# Altium PCB SAST_PCB_V2B_Test_Beta_Sensors.PcbDoc
Units mil, origin at the board's own origin, x right, y up, seen from the top; angles counter-clockwise.
Board outline 2500 x 2500 mil, 2 copper layers (Top Layer, Bottom Layer); 75 components, 34 nets, 222 pads, 55 vias.
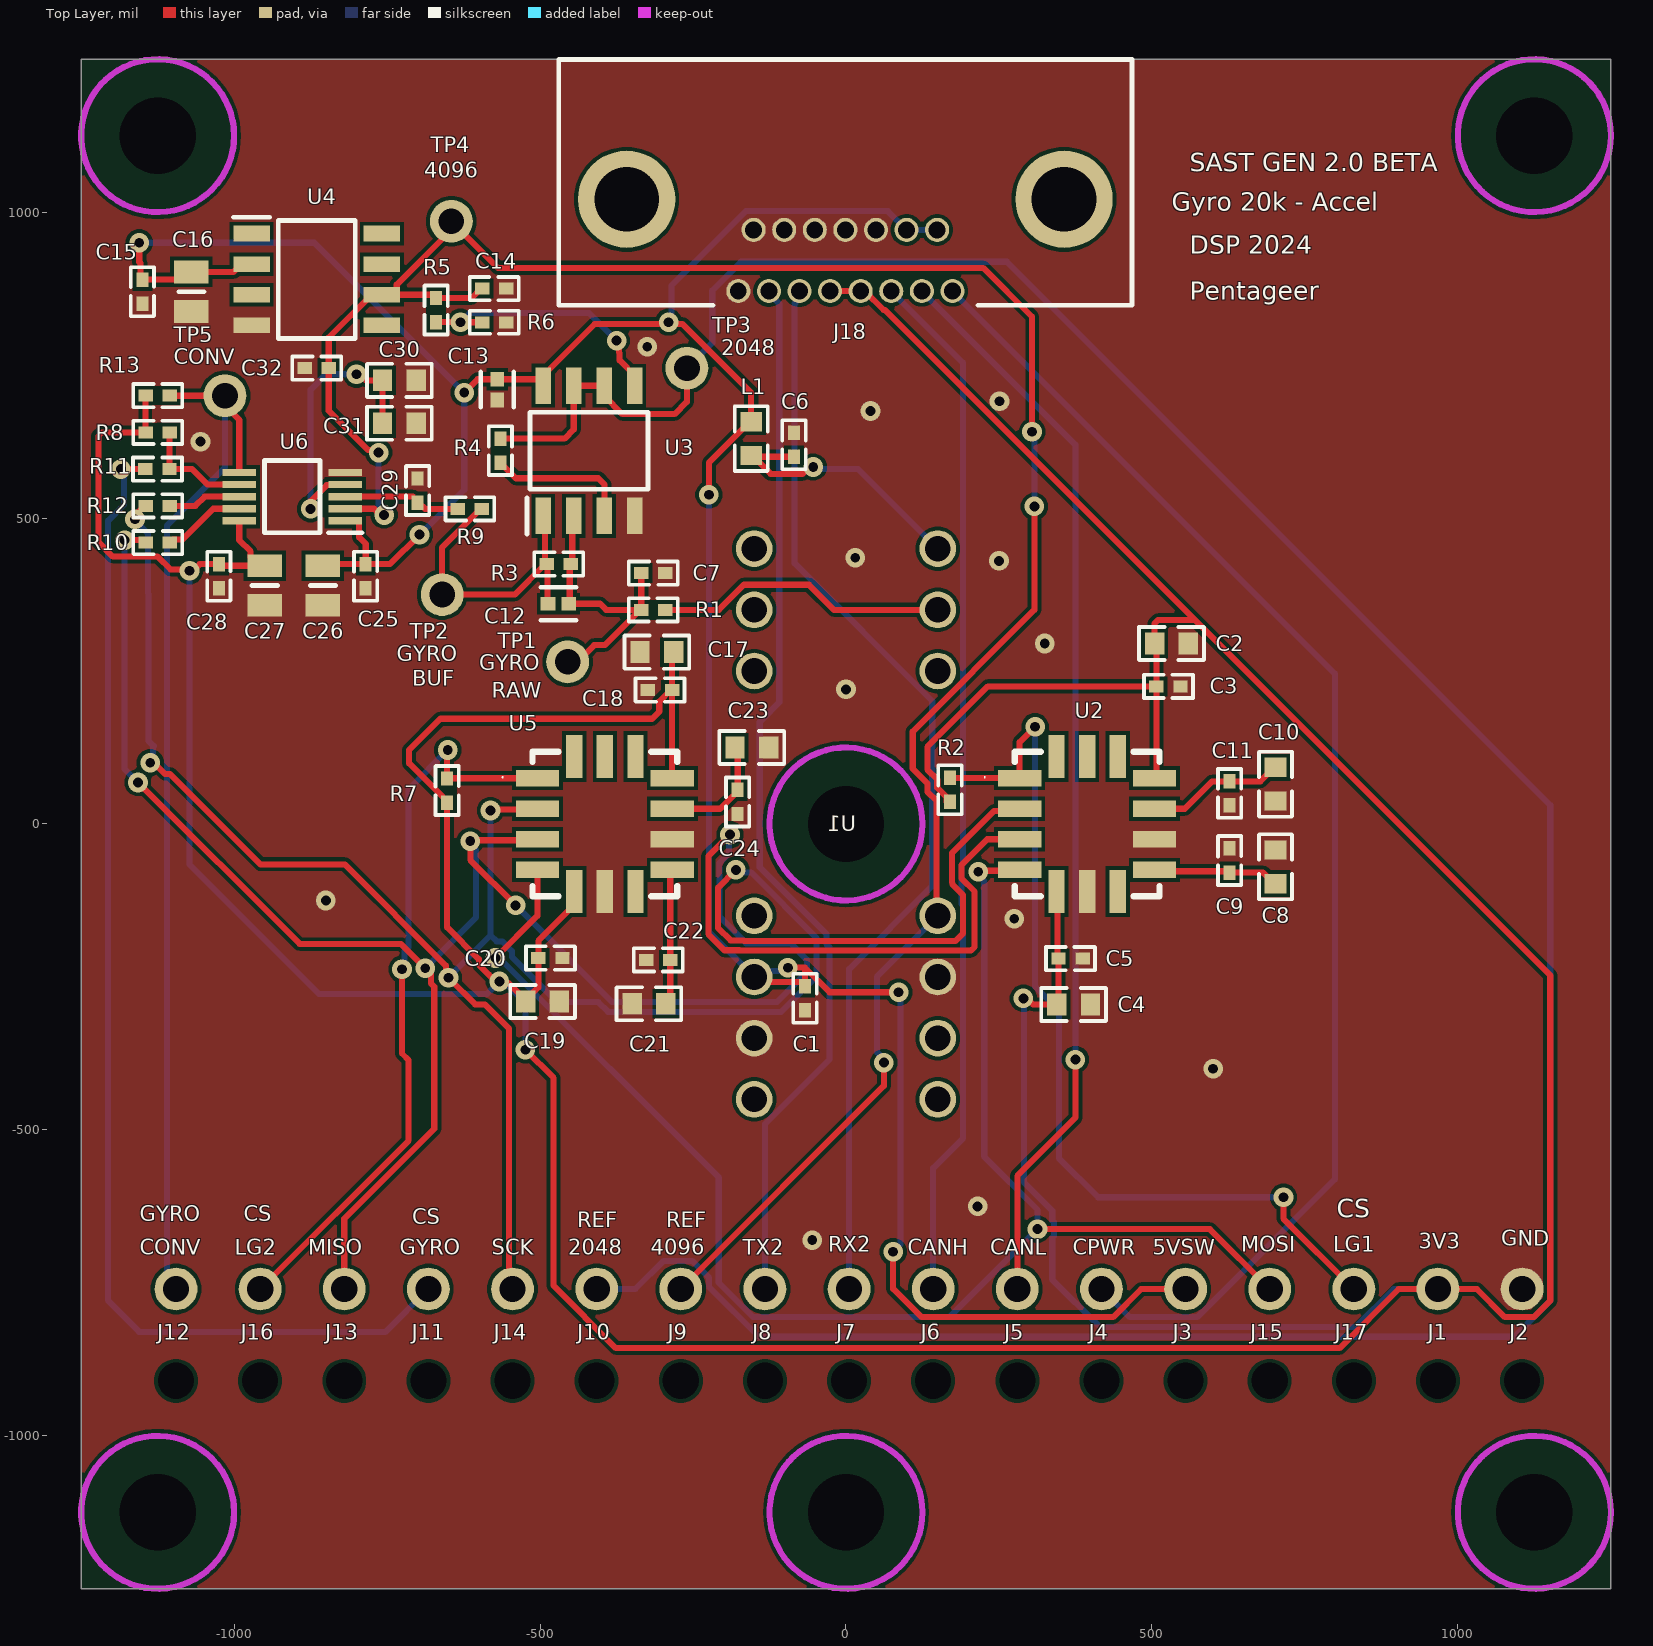
[diagram p0: Top Layer view]
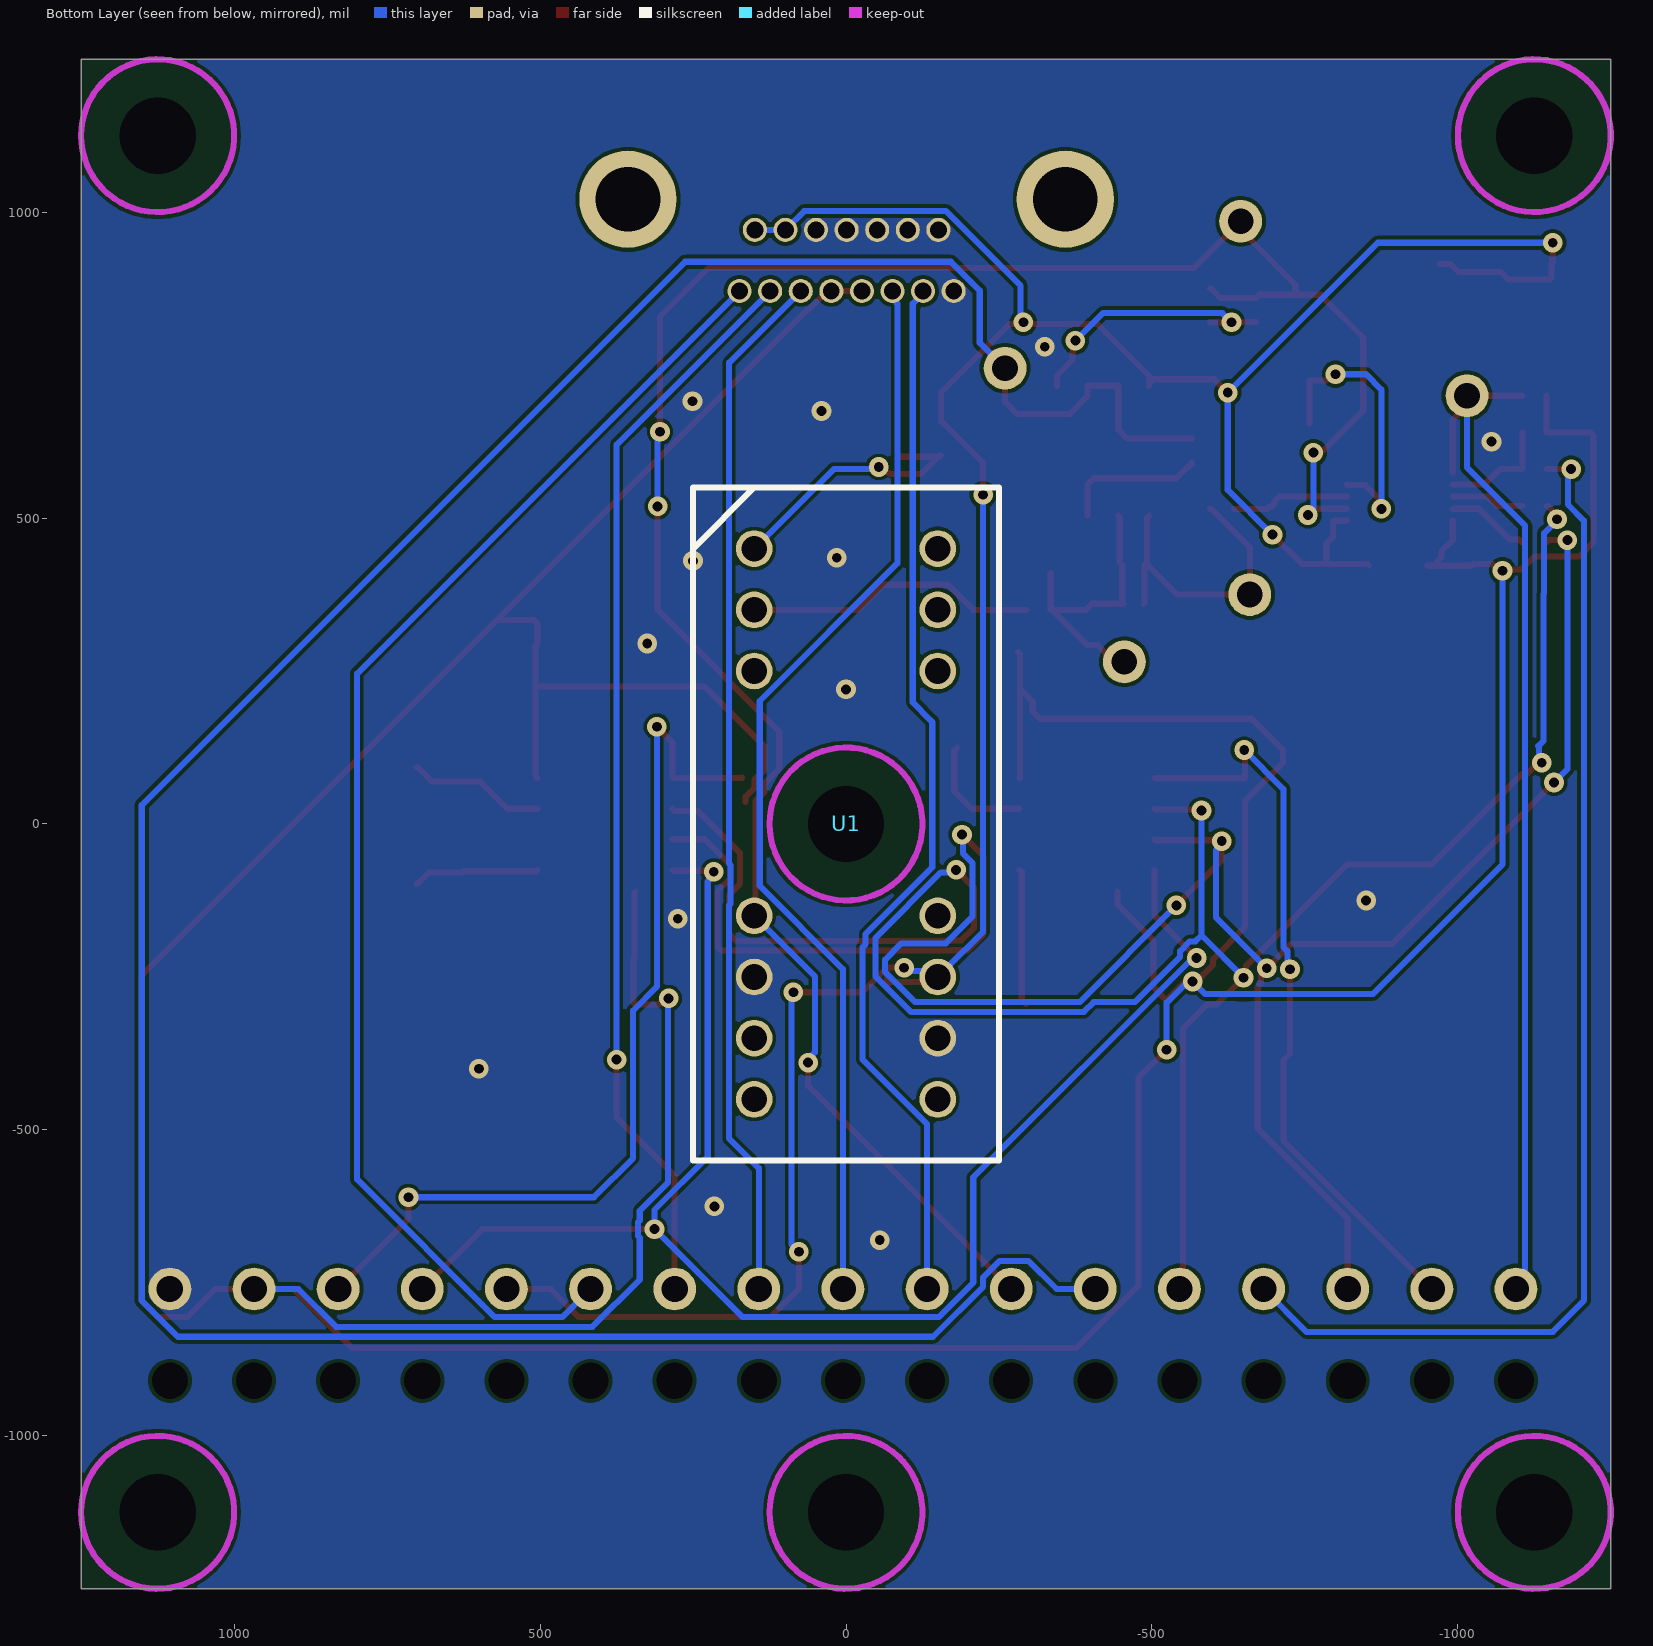
[diagram p1: Bottom Layer view, seen from below]

## Layer stack, top to bottom
Top Solder: solder mask 0.4, Solder Resist, Dk 3.5
Top Layer: signal copper 1.4
Dielectric 1: dielectric 12.6, FR-4, Dk 4.8
Bottom Layer: signal copper 1.4
Bottom Solder: solder mask 0.4, Solder Resist, Dk 3.5

## Board outline
-1250,-1250 -1250,1250 1250,1250 1250,-1250

## Design rules (kind name [scope] priority, off if disabled: settings)
Clearance [All] p1: gap=6 ignorepadtopadclearanceinfootprint=FALSE
HoleSize [All] p1: absolutevalues=TRUE maxlimit=150 minlimit=1 maxpercent=80.000 minpercent=20.000
MinimumSolderMaskSliver [All] p1: minsoldermaskwidth=2
PolygonConnect [All] p1: connectstyle=Direct reliefconductorwidth=8 reliefentries=4 polygonreliefangle="90 Angle" airgapwidth=6
RoutingVias [All] p1: holewidth=16 width=32 viastyle="Through Hole" minholewidth=12 minwidth=24 maxholewidth=28 maxwidth=50
SilkToSilkClearance [All] p1: silktosilkclearance=4
SilkToSolderMaskClearance [IsPad] p1: minsilkscreentomaskgap=2 clearancetoexposedcopper=TRUE
SolderMaskExpansion [All] p1: expansion=4 istentingtop=FALSE
Width [InNetClass('All Nets')] p1: maxlimit=30 minlimit=10 preferedwidth=10 minimp=50.000000 maximp=50.000000 favimp=50.000000
26 further rules are at their usual default settings.

## Components (designator, comment, footprint, x,y, rotation, side; value= is the part's Value field where it differs from the comment)
C1 "25V" 0402_DSP -67,-285 r90 top value=0.1uF
C2 "CAP CER 1UF 16V X8L 0603" 0603_DSP 532,295 r0 top value=1uF
C3 "CAP CER .1UF 10V X8M 0201" 0402_DSP 527,225 r180 top value=0.1uF
C4 "CAP CER 1UF 16V X8L 0603" 0603_DSP 372,-295 r0 top value=1uF
C5 "CAP CER .1UF 10V X8M 0201" 0402_DSP 367,-220 r180 top value=0.1uF
C6 "25V" 0402_DSP -85,620 r270 top value=0.1uF
C7 "CAP CER 0.022UF 25V X8R 0402" 0402_DSP -315,410 r0 top value=22nF
C8 "CAP CER 1UF 16V X8L 0603" 0603_DSP 702,-70 r90 top value=1uF
C9 "CAP CER .1UF 10V X8M 0201" 0402_DSP 627,-59.68 r270 top value=0.1uF
C10 "CAP CER 1UF 16V X8L 0603" 0603_DSP 702,65 r270 top value=1uF
C11 "CAP CER .1UF 10V X8M 0201" 0402_DSP 627,50 r90 top value=0.1uF
C12 "GCM155L81E104KE02D" FP-GCM155-0_05-IPC_B -470,360 r0 top value=1000pF
C13 "GCM155L81E104KE02D" FP-GCM155-0_05-IPC_B -570,710 r270 top value=0.1uF
C14 "CAP CER .1UF 10V X8M 0201" 0402_DSP -575,875 r180 top value=0.1uF
C15 "CAP CER .1UF 10V X8M 0201" 0402_DSP -1150,870 r90 top value=0.1uF
C16 "CAP CER 10UF 16V X8M 0805" CAPC2012X140N -1070,870 r90 top value=10uF
C17 "CAP CER 1UF 16V X8L 0603" 0603_DSP -309,281 r180 top value=1uF
C18 "CAP CER .1UF 10V X8M 0201" 0402_DSP -304,219 r0 top value=0.1uF
C19 "CAP CER 1UF 16V X8L 0603" 0603_DSP -496,-290 r0 top value=1uF
C20 "CAP CER .1UF 10V X8M 0201" 0402_DSP -483,-219 r180 top value=0.1uF
C21 "CAP CER 1UF 16V X8L 0603" 0603_DSP -322,-294 r180 top value=1uF
C22 "CAP CER .1UF 10V X8M 0201" 0402_DSP -307,-222 r0 top value=0.1uF
C23 "CAP CER 1UF 16V X8L 0603" 0603_DSP -154,125 r0 top value=1uF
C24 "CAP CER .1UF 10V X8M 0201" 0402_DSP -177,36 r90 top value=0.1uF
C25 "CAP CER .1UF 10V X8M 0201" 0402_DSP -785,405 r90 top value=0.1uF
C26 "CAP CER 10UF 16V X8M 0805" CAPC2012X140N -855,390 r90 top value=10uF
C27 "CAP CER 10UF 16V X8M 0805" CAPC2012X140N -950,390 r90 top value=10uF
C28 "CAP CER .1UF 10V X8M 0201" 0402_DSP -1025,405 r90 top value=0.1uF
C29 "CAP CER 0.022UF 25V X8R 0402" 0402_DSP -700,545 r270 top value=22nF
C30 "CAP CER 1UF 16V X8L 0603" 0603_DSP -730,725 r180 top value=1uF
C31 "CAP CER 1UF 16V X8L 0603" 0603_DSP -730,655 r180 top value=1uF
C32 "CAP CER .1UF 10V X8M 0201" 0402_DSP -865,745 r0 top value=0.1uF
J1 "" Wire24Awg2x1HPAD 967.5,-760 r270 top
J2 "" Wire24Awg2x1HPAD 1105,-760 r270 top
J3 "" Wire24Awg2x1HPAD 555,-760 r270 top
J4 "" Wire24Awg2x1HPAD 417.5,-760 r270 top
J5 "" Wire24Awg2x1HPAD 280,-760 r270 top
J6 "" Wire24Awg2x1HPAD 142.5,-760 r270 top
J7 "" Wire24Awg2x1HPAD 5,-760 r270 top
J8 "" Wire24Awg2x1HPAD -132.5,-760 r270 top
J9 "" Wire24Awg2x1HPAD -270,-760 r270 top
J10 "" Wire24Awg2x1HPAD -407.5,-760 r270 top
J11 "" Wire24Awg2x1HPAD -682.5,-760 r270 top
J12 "" Wire24Awg2x1HPAD -1095,-760 r270 top
J13 "" Wire24Awg2x1HPAD -820,-760 r270 top
J14 "" Wire24Awg2x1HPAD -545,-760 r270 top
J15 "" Wire24Awg2x1HPAD 692.5,-760 r270 top
J16 "" Wire24Awg2x1HPAD -957.5,-760 r270 top
J17 "" Wire24Awg2x1HPAD 830,-760 r270 top
J18 "MDLM-15PCBRP-F222" MDLM-15PCBRP-F222 174,871 r180 top
L1 "Inductor" 0603_DSP -155,630 r90 top value=6.8uH
R1 "" 0402_DSP -315,350 r180 top value=3.3k
R2 "" 0402_DSP 170,56 r270 top value=100k
R3 "0402" 0402_DSP -469.69,425 r0 top value=16.5k
R4 "0402" 0402_DSP -565,610.32 r270 top value=3.3k
R5 "0402" 0402_DSP -670,840 r270 top value=100k
R6 "0402" 0402_DSP -575,820 r0 top value=100k
R7 "" 0402_DSP -652,54.69 r270 top value=100k
R8 "" 0402_DSP -1125,640 r0 top value=10k
R9 "" 0402_DSP -614.69,515 r0 top value=3.3k
R10 "" 0402_DSP -1124.69,460 r0 top value=49.9
R11 "" 0402_DSP -1125.32,580 r0 top value=49.9
R12 "" 0402_DSP -1125,520 r0 top value=49.9
R13 "" 0402_DSP -1125,700 r0 top value=10k
TP1 "" TestPoint_4952 -455,265 r90 top
TP2 "" TestPoint_4952 -660,375 r90 top
TP3 "" TestPoint_4952 -260,745 r90 top
TP4 "" TestPoint_4952 -645,985 r90 top
TP5 "" TestPoint_4952 -1015,700 r90 top
U1 "ADXRS649Z_Eval" ADXRS649Z_EVAL 0,0 r180 bottom
U2 "ACCEL 10-40G I2C/SPI 14CLCC" ADXL355BEZ 394,0 r0 top
U3 "ADA4099-2HRZ" SOIC127P600X175-8N -420,610 r90 top
U4 "ADR292ERZ" SOIC127P600X175-8N -865,890 r0 top
U5 "ACCEL 10-40G I2C/SPI 14CLCC" ADXL355BEZ -394,0 r0 top
U6 "IC ADC 12BIT SAR 10MSOP" SOP50P490X110-10N -905,535 r180 top

## Footprints (in the part's own frame and the unit in brackets; to place one, negate y for a bottom-side part, rotate by r counter-clockwise, add the part's x,y. Pads: shape width x height; smd on the part's side, far side on the other; paste and mask are expansions set on the pad)
0402_DSP [mm]
  rect 0.6x0.5 smd: 1(-0.5,0) 2(0.5,0)
  silkscreen extent -1.02,-0.48 1.02,0.48, body extent -0.55,-0.3 0.55,0.3, height 1.3
0603_DSP [mm]
  rect 0.8x0.9 smd: 1(-0.7,0) 2(0.7,0)
  silkscreen extent -1.35,-0.69 1.35,0.69, body extent -0.87,-0.48 0.87,0.48, height 1.3
ADXL355BEZ [mm]
  rect 1.8x0.68 smd: 1(-2.8,1.905) 2(-2.8,0.635) 3(-2.8,-0.635) 4(-2.8,-1.905) 8(2.8,-1.905) 9(2.8,-0.635) 10(2.8,0.635) 11(2.8,1.905)
  rect 0.68x1.8 smd: 5(-1.27,-2.8) 6(0,-2.8) 7(1.27,-2.8) 12(1.27,2.8) 13(0,2.8) 14(-1.27,2.8)
  silkscreen extent -4.27,-3 3,3, body extent -3,-3 3,3, height 2.2
ADXRS649Z_EVAL [mil]
  round 60 hole 42: 1(-150,450) 2(-150,350) 3(-150,250) 7(-150,-150) 8(-150,-250) 9(-150,-350) 10(-150,-450) 11(150,-450) 12(150,-350) 13(150,-250) 14(150,-150) 18(150,250) 19(150,350) 20(150,450)
  silkscreen extent -250,-550 250,550
CAPC2012X140N [mm]
  rect 0.94x1.43 smd: 1(-0.82,0) 2(0.82,0)
  silkscreen extent 0,-0.53 0,0.53, body extent -1,-0.63 1,0.63, height 1.4
FP-GCM155-0_05-IPC_B [mil]
  rect 24.23x22.54 smd paste+0 mask+0: 1(-16.87,0) 2(16.87,0)
  silkscreen extent -29,-27 29,27, body extent -35,-17 35,17, height 10
MDLM-15PCBRP-F222 [mm]
  round 1 hole 0.7: 1(0,0) 2(1.27,0) 3(2.54,0) 4(3.81,0) 5(5.08,0) 6(6.35,0) 7(7.62,0) 8(8.89,0) 9(0.635,-2.54) 10(1.905,-2.54) 11(3.175,-2.54) 12(4.445,-2.54) 13(5.715,-2.54) 14(6.985,-2.54) 15(8.255,-2.54)
  round 4.035 hole 2.69: MH1(-4.635,-3.81) MH2(13.525,-3.81)
  silkscreen extent -7.45,-9.61 16.34,0.59, body extent -7.45,-16.11 16.34,0.59, height 6.35
SOIC127P600X175-8N [mm]
  rect 1.5x0.65 smd: 1(-2.7,1.905) 2(-2.7,0.635) 3(-2.7,-0.635) 4(-2.7,-1.905) 5(2.7,-1.905) 6(2.7,-0.635) 7(2.7,0.635) 8(2.7,1.905)
  silkscreen extent -3.45,-2.45 1.6,2.58, body extent -3,-2.45 3,2.45, height 1.75
SOP50P490X110-10N [mm]
  rect 1.4x0.3 smd: 1(-2.2,1) 2(-2.2,0.5) 3(-2.2,0) 4(-2.2,-0.5) 5(-2.2,-1) 6(2.2,-1) 7(2.2,-0.5) 8(2.2,0) 9(2.2,0.5) 10(2.2,1)
  silkscreen extent -2.9,-1.5 1.15,1.5, body extent -2.45,-1.5 2.45,1.5, height 1.1
TestPoint_4952 [mil]
  round 70 hole 42: 1(0,0)
Wire24Awg2x1HPAD [mil]
  round 70 hole 43: 1(0,0)
  round 0 hole 59 unplated: ""(150,0)

## Part data
C1 C6: library part Cap, "Capacitor", LatestRevisionDate=17-Jul-2002, LatestRevisionNote="Re-released for DXP Platform.", PackageDescription="Radial Cap, Thru-Hole; 2 Leads; 0.3 in Pin Spacing", PackageReference=RAD-0.3, Published=8-Jun-2000, Publisher="Altium Limited"
C2 C4 C8 C10 C17 C19 C21 C23 C30 C31: library part GCG188L8EE105KA07D, "Capacitor: 1 µF ±10% 16V Ceramic Capacitor X8L 0603", Case/Package=0603, Manufacturer_Name="Murata Electronics", Mouser Part Number=81-GCG188L8EE105KA7D, Voltage=16V, Arrow Part Number=GCG188L8EE105KA07D, Arrow Price/Stock=https://www.arrow.com/en/products/gcg188l8ee105ka07d/murata-manufacturing, Datasheet Link=https://psearch.en.murata.com/capacitor/product/GCG188L8EE105KA07%23.html, Height=0.9mm, Manufacturer_Part_Number=GCG188L8EE105KA07D, Mouser Price/Stock=https://www.mouser.co.uk/ProductDetail/Murata-Electronics/GCG188L8EE105KA07D?qs=rrS6PyfT74dFMfTR80dVTA%3D%3D
C3 C5 C9 C11 C14 C15 C18 C20 C22 C24 C25 C28 C32: library part GCM033M8ED104KE07J, "Capacitor: 0.1 µF ±10% 10V Ceramic Capacitor X8M 0201", Case/Package=0402, Manufacturer_Name="Murata Electronics", Mouser Part Number=81-GCM033M8ED104KE07, Voltage=10V, Datasheet Link=https://search.murata.co.jp/Ceramy/image/img/A01X/G101/ENG/GCM033M8ED104KE07-01A.pdf, Height=0.33mm, Manufacturer_Part_Number=GCM033M8ED104KE07J, Mouser Price/Stock=https://www.mouser.co.uk/ProductDetail/Murata-Electronics/GCM033M8ED104KE07J?qs=xZFQr2mActesc5d29hjXRw%3D%3D
C7 C29: library part C1005X8R1E223K050BB, "Capacitor: 0.022 µF ±10% 25V Ceramic Capacitor X8R 0402 (1005 Metric)", Case/Package=0402, Manufacturer_Name=TDK, Voltage=25V, Datasheet Link=https://product.tdk.com/info/en/catalog/datasheets/mlcc_commercial_midvoltage_en.pdf, Height=0.55mm, Manufacturer_Part_Number=C1005X8R1E223K050BB
C12 C13: library part CMP-06035-044163-1, "Ceramic Capacitor for Automotive 100nF ±10% 25VDC X8L 0402 Paper T/R", Manufacturer_Name="Murata Electronics", Voltage=25V, Manufacturer_Part_Number=GCM155L81E104KE02D, Supplier_Name=Mouser, Supplier_Part_Number=81-GCM155L81E104KE2D
  C13: Picture=CAP_0.1uF
C16 C26 C27: library part GCM21BM8EE106KE08L, "Capacitor:  10 µF ±10% 16V Ceramic Capacitor X8M 0805 (2012 Metric)", Case/Package=0805, Manufacturer_Name="Murata Electronics", Mouser Part Number=81-GCM21BM8EE106KE8L, Voltage=16V, Arrow Part Number=GCM21BM8EE106KE08L, Arrow Price/Stock=https://www.arrow.com/en/products/gcm21bm8ee106ke08l/murata-manufacturing?region=nac, Datasheet Link=https://psearch.en.murata.com/capacitor/product/GCM21BM8EE106KE08%23.html, Height=1.4mm, Manufacturer_Part_Number=GCM21BM8EE106KE08L, Mouser Price/Stock=https://www.mouser.co.uk/ProductDetail/Murata-Electronics/GCM21BM8EE106KE08L?qs=rrS6PyfT74fl6X5LUXfufw%3D%3D
J1 J2 J3 J4 J5 J6 J7 J8 J9 J10 J11 J12 J13 J14 J15 J16 J17: library part Socket, "Socket", LatestRevisionDate=17-Jul-2002, LatestRevisionNote="Re-released for DXP Platform.", Publisher="Altium Limited"
J18: "Connector", Manufacturer_Name="ITT CANNON", Height=0.250, Manufacturer_Part_Number=MDLM-15PCBRP-F222
R1 R9: library part "Resistor 0402", Case/Package=0402, Manufacturer_Name="Vishay / Dale", Manufacturer_Part_Number=CRCW04023K30FKEDC, Supplier_Name=Mouser, Supplier_Part_Number=71-CRCW04023K30FKEDC
R2 R7: library part "Resistor 0402", Manufacturer_Name="Vishay / Dale", Manufacturer_Part_Number=CRCW0402100KFKEDC, Supplier_Name=Mouser, Supplier_Part_Number=71-CRCW0402100KFKEDC
R3: library part "Resistor 0402", Manufacturer_Name="Vishay / Dale", Manufacturer_Part_Number=CRCW04023K30FKEDC, Supplier_Name=Mouser, Supplier_Part_Number=71-CRCW04023K30FKEDC
R4: library part Res1, "Resistor", LatestRevisionDate=17-Jul-2002, LatestRevisionNote="Re-released for DXP Platform.", PackageDescription="Axial Device, Thru-Hole; 2 Leads; 0.3 in Pin Spacing", PackageReference=AXIAL-0.3, Published=8-Jun-2000, Publisher="Altium Limited"
R5 R6: library part "Resistor 0402", Manufacturer_Name="Vishay / Dale", Tolerance=0.1%, Supplier_Name=Mouser
R8 R13: library part "Resistor 0402", Case/Package=0402, Manufacturer_Name="Vishay / Dale", Manufacturer_Part_Number=CRCW040210K0FKEDC, Supplier_Name=Mouser, Supplier_Part_Number=71-CRCW040210K0FKEDC
R10 R11 R12: library part "Resistor 0402", Case/Package=0402, Manufacturer_Name="Vishay / Dale", Supplier_Name=Mouser
TP1 TP2 TP3 TP4 TP5: library part Test_Point, Mouser_Part_Number=534-4952
U2 U5: library part ADXL357BEZ, "Integrated Circuit:Accelerometer X, Y, Z Axis ±10g, ±20g, ±40g 1Hz ~ 1kHz 14-CLCC (6x6)", Manufacturer_Name="Analog Devices", Mouser Part Number=584-ADXL357BEZ, Arrow Part Number=ADXL357BEZ, Arrow Price/Stock=https://www.arrow.com/en/products/adxl357bez/analog-devices?region=asia, Datasheet Link=https://componentsearchengine.com/Datasheets/2/ADXL357BEZ.pdf, Height=2.25mm, Manufacturer_Part_Number=ADXL357BEZ, Mouser Price/Stock=https://www.mouser.co.uk/ProductDetail/Analog-Devices/ADXL357BEZ?qs=JxTdDJPFbyK%252BcMwBtm6iZg%3D%3D
U3: Manufacturer_Name="Analog Devices", DeviceSetName=ADA4099-2HRZ, GateName_1=G$1, Height=1.75mm, LibraryName=ADA4099-2HRZ, Manufacturer_Part_Number=ADA4099-2HRZ, Supplier_Name=Mouser, Supplier_Part_Number=584-ADA4099-2HRZ, SymbolName_1=ADA4099-2HRZ
U4: "Voltage Reference 4.096V, (input min 4.4V)", Manufacturer_Name="Analog Devices", Mouser Part Number=584-ADR292ERZ, Arrow Part Number=ADR292ERZ, Arrow Price/Stock=https://www.arrow.com/en/products/adr292erz/analog-devices?region=nac, Datasheet Link=http://www.analog.com/static/imported-files/data_sheets/ADR291_292.pdf, Height=1.75mm, Manufacturer_Part_Number=ADR292ERZ, Mouser Price/Stock=https://www.mouser.co.uk/ProductDetail/Analog-Devices/ADR292ERZ?qs=WIvQP4zGanjFAAEqrXyPZQ%3D%3D
U6: library part AD7091RBRMZ, "Integrated Circuit:12 Bit Analog to Digital Converter 1 Input 1 SAR 10-MSOP", Manufacturer_Name="Analog Devices", Mouser Part Number=584-AD7091RBRMZ, Arrow Part Number=AD7091RBRMZ, Arrow Price/Stock=https://www.arrow.com/en/products/ad7091rbrmz/analog-devices?region=nac, Datasheet Link=https://componentsearchengine.com/Datasheets/1/AD7091RBRMZ.pdf, Height=1.1mm, Manufacturer_Part_Number=AD7091RBRMZ, Mouser Price/Stock=https://www.mouser.co.uk/ProductDetail/Analog-Devices/AD7091RBRMZ?qs=NmRFExCfTkFn%252B92PbnlqTA%3D%3D
L1: Code_IEC=1005, Code_JEITA=0402, LatestRevisionDate=29-May-2009, LatestRevisionNote="IPC-7351 Footprint Added.", PackageDescription="Chip Inductor", PackageReference=0603, Published=8-Jun-2000, Publisher="Altium Limited"

## Free pads (board coordinates)
  round 0 hole 125 unplated: ""(-1125,-1125) ""(-1125,1125) ""(0,-1125) ""(0,0) ""(1125,-1125) ""(1125,1125)

## Via types
v1: diameter 32, hole 16, Top Layer to Bottom Layer, tented both sides, 55 vias

## Nets (pads, with @x,y where several pads share a name; then routed paths per layer and width w, separated by ;. In a path a pad name is that pad's centre, name@x,y a point inside that pad or via, vN(x,y) a via of type N, cw(c..) or ccw(c..) an arc to the next point about the centre after c; other vN are vias at no path point)
3V3: C2.1 C3.2 C4.1 C5.2 C17.1 C18.2 C19.1 C20.2 C27.2 C28.2 J1.1 J18.4 J18.5 R2.2 R7.2 R8.1 R13.1 U2.5 U2.11 U5.5 U5.11 U6.10 | length 9896.9
  Top Layer w10: R13.1 R8.1 -1216.14,640 -1222,634.14 -1222,461 -1198.1,437.1 -1190.29,437.1 -1190.18,437 -1167.82,437 -1167.71,437.1 -1125.02,437.1 -1104,416.09 -1075.09,416.09 v1(-1073,414) -1067.05,414 -1056.36,424.69 C28.2 -1022.32,422 -950.28,422 C27.2 -959.65,422.28 -973.15,435.79 -973.15,445.43 -991.61,463.9 U6.10 ; v1(-566.44,-257.37) -572.4,-257.37 -583.76,-246 -584.18,-246 -600,-230.18 -600,-221 -652,-169 R7.2 -652,36.97 -714,98.97 -714,121 -663,172 -316.86,172 -305.27,183.59 -305.27,200.02 -286.28,219 C18.2 ; v1@-565,-256 -560.79,-260.21 -551.38,-260.21 C19.1@-523.56,-288.03 ; v1(-524,-369) -478,-415 -478,-754.55 -376.05,-856.5 806.68,-856.5 903.18,-760 J1.1 1030.89,-760 1076.89,-806 1124.05,-806 1151,-779.05 1151,-247.42 570.01,333.57 ; C19.1 C19.1@-523.56,-288.03 ; U5.5 -444,-132.28 -502.69,-190.97 C20.2 -502.69,-267.16 C19.1@-523.56,-288.03 ; U5.11 -284.31,75.55 C18.2 ; C17.1 -284.31,278.13 C18.2 ; J18.5 30.6,871 61.29,840.31 63.27,840.31 570.01,333.57 ; R2.2@164,36.28 164,44.48 149.16,59.32 149.16,72.87 133,89.03 133,126 232,225 C3.2 ; v1(290,-285) 295.95,-285 305.95,-295 C4.1 347.31,-292.13 C5.2 345.66,-218.34 345.66,-111.89 U2.5 ; U2.11 507.31,78.08 C3.2 ; C3.2 507.31,292.13 C2.1 504.44,327.72 510.3,333.57 570.01,333.57
  Bottom Layer w10: v1(-1073,414) -1073,-66 -861.12,-277.88 -661.07,-277.88 -660.82,-278.13 -638.45,-278.13 -638.21,-277.88 -586.96,-277.88 -565.08,-256 -560,-256 -524,-292 v1(-524,-369) ; v1(290,-285) 291,-286 291,-586 337,-632 337,-647.82 340,-650.82 340,-673.18 337,-676.18 337,-744.55 414.45,-822 833.05,-822 895.05,-760 J1.1
5V_SW: C1.2 C13.1 C15.2 C16.2 C25.2 C26.2 J3.1 J18.9 J18.10 L1.2 U1.13 U3.8 U4.2 U6.1 | length 4953.9
  Top Layer w10: v1(-1155,950) -1155,918.25 -1153.25,916.5 -1153.25,892.94 C15.2 -1082.6,889.69 C16.2 -1000.75,902.28 -988.03,915 U4.2 ; C26.2 -852.6,424.69 C25.2 ; U6.1 -796.73,495.63 -795.83,494.72 -795.83,468.52 -785,457.7 C25.2 ; v1(-697,473) -745.31,424.69 C25.2 ; v1(-624,705) -623.9,705 -602.03,726.87 C13.1 -502.8,726.87 U3.8@-495,719.08 ; U3.8 U3.8@-495,719.08 ; v1(-224,538) -224,590.53 -156.97,657.56 L1.2 -155,705.05 -266.95,817 -411.03,817 -495,733.03 U3.8@-495,719.08 ; U1.13 -141.5,-258.5 -71.84,-258.5 C1.2@-67,-263.35 ; v1(-95,-235) -94.8,-234.8 -67,-234.8 ; C1.2 C1.2@-67,-263.35 ; v1(77,-699) 77,-759.55 123.45,-806 436.55,-806 482.55,-760 J3.1 ; v1(86,-275) -26.8,-275 -67,-234.8 ; C1.2@-67,-263.35 -67,-234.8
  Bottom Layer w10: v1(-1155,950) -869,950 v1(-624,705) -624,546 v1(-697,473) ; v1(-290,820) -285,825 -285,880.4 -163.71,1001.69 68.31,1001.69 J18.10 J18.9 ; v1(-224,538) -224,-176 -165,-235 -145.61,-235 -140.18,-240.43 -106.39,-240.43 -100.95,-235 v1(-95,-235) ; v1(77,-699) 89,-687 89,-278 v1(86,-275)
A3: C6.2 L1.1 U1.1 | length 443.3
  Top Layer w10: L1.1 -153.03,602.44 L1.1@-150.91,600.31 ; C6.2 L1.1@-150.91,600.31 ; v1(-53.68,583.51) -59.63,583.51 -70.82,572.31 -122.9,572.31 L1.1@-150.91,600.31
  Bottom Layer w10: v1(-53.68,583.51) -50.26,580.09 19.91,580.09 U1.1
B1: R1.1 U1.2 | length 479.3
  Top Layer w10: R1.1 -207.98,350 -166.98,391 -60.76,391 -19.76,350 U1.2
CAN_PWR: J4.1 J18.1 | length 2204.8
  Bottom Layer w10: J18.1 799.14,245.86 799.14,-580.91 574.05,-806 463.5,-806 J4.1
CANH: J6.1 J18.3 | length 1701.2
  Bottom Layer w10: J18.3 191,754 191,-64.82 189,-66.82 189,-131.02 191,-133.02 191,-514.14 142.5,-562.64 J6.1
CANL: J5.1 J18.2 | length 1774.3
  Top Layer w10: J5.1 280,-575 375,-480 v1(375,-385)
  Bottom Layer w10: J18.2 375,620 v1(375,-385)
CS_GYRO: J11.1 R11.1 | length 1968.4
  Top Layer w10: v1(-1185,580) R11.1
  Bottom Layer w10: v1@-1180,565 -1180,521.91 -1206,495.91 -1206,-779 -1155,-830 -752.5,-830 J11.1
CS_LG1: J17.1 R2.1 U2.1 | length 1520.8
  Top Layer w10: R2.1 170.34,75.34 283.42,75.34 U2.1 283.76,133.76 v1(309,159) ; v1(715,-610) 715,-645 J17.1
  Bottom Layer w10: v1(309,159) 309,-265.82 348,-304.82 348,-546 412,-610 v1(715,-610)
CS_LG2: J16.1 R7.1 U5.1 | length 1211.8
  Top Layer w10: J16.1 -715,-517.5 -715,-385.74 -725.65,-375.1 v1(-725.65,-237.39) ; v1(-651,121) -651,119 -652,118 R7.1 -651.69,74.68 -504.55,74.68 U5.1
  Bottom Layer w10: v1(-725.65,-237.39) -721.44,-233.18 -721.44,-207.83 -715,-201.39 -715,57 v1(-651,121)
F3: U1.9
F4: U1.10
GND: C1.1 C2.2 C3.1 C4.2 C5.1 C6.1 C7.2 C8.2 C9.1 C10.2 C11.1 C13.2 C14.1 C15.1 C16.1 C17.2 C18.1 C19.2 C20.1 C21.2 C22.1 C23.2 C24.1 C25.1 C26.1 C27.1 C28.1 C29.1 C30.1 C31.1 C32.1 J2.1 J18.8 J18.11 J18.12 J18.13 J18.14 J18.15 R6.2 U1.8 U1.12 U2.6 U2.9 U3.4 U4.4 U5.6 U5.9 U6.5
  other v1: -55,-680 215,-625 600,-400 275,-155 -850,-125 0,220 325,295 250,430 15,435 -1055,625 40,675 250.88,690.88 -325,780
Gyro_Buf: C12.1 R3.1 R9.2 TP2.1 U3.1 | length 506.5
  Top Layer w10: R9.2 -596.97,515 -660,451.97 TP2.1 -541.34,375 -493.84,422.5 -491.87,422.5 R3.1 ; U3.1 -492.18,500.89 -492.18,427.81 R3.1 ; C12.1 -488.12,361.25 -488.12,423.75 R3.1
Gyro_CONV: J12.1 R13.2 TP5.1 U6.6 | length 1731.2
  Top Layer w10: R13.2 TP5.1 -1015,683.76 -991.61,660.38 U6.6
  Bottom Layer w10: J12.1 -1095,-743.76 -1110,-728.76 -1110,487.57 -1015,582.57 TP5.1
Gyro_RAW: C7.1 C12.2 R1.2 R3.2 TP1.1 U3.2 | length 482.9
  Top Layer w10: TP1.1 -439.22,265 -411.76,292.47 -394.19,292.47 R1.2@-336.65,350 ; C12.2 C12.2@-452.28,360 ; U3.2 -447.5,501.2 -447.5,427.5 R3.2 -451.56,423.44 -451.56,360.72 C12.2@-452.28,360 ; C7.1 R1.2 R1.2@-336.65,350 ; C12.2@-452.28,360 -401.89,360 -391.89,350 R1.2@-336.65,350
Gyro_Ref_2048: J10.1 R4.1 TP3.1 U3.6 U3.7 | length 4848
  Top Layer w10: R4.1 -460,630 -445,645 U3.7 U3.6 -395,699.57 -365.43,670 -280,670 -260,690 TP3.1
  Bottom Layer w10: J10.1 -344.11,-760 -298.11,-714 -250.95,-714 -224,-740.95 -224,-756.18 -142.18,-838 1092.05,-838 1151,-779.05 1151,31 263,919 -171.4,919 -218.61,871.78 -218.61,786.39 TP3.1
Gyro_Ref_4096: C14.2 C32.2 J9.1 R5.1 TP4.1 U1.7 U4.6 U6.2 | length 3731
  Top Layer w10: U6.2 -771.27,515.32 -760.95,505 v1(-755,505) ; v1(-764,607) -768,611 -781,611 -845.31,675.31 C32.2 -845.31,795.12 -775.43,865 U4.6 U4.6@-741.97,865 ; R5.1@-674.84,865 U4.6@-741.97,865 ; R5.1 -611.97,859.68 -596.65,875 C14.2 ; J9.1 62,-428 v1(62,-390) ; U1.7 148,-148 148,37.85 133.16,52.69 133.16,66.25 109,90.4 109,151.02 308,350.02 v1(308,519) ; v1(304,641) 304,829 224,909 -569,909 TP4.1 -645,970.82 -734.17,881.65 -734.17,872.8 U4.6@-741.97,865
  Bottom Layer w10: v1(-764,607) -764,514 v1(-755,505) ; v1(62,-390) 62,-384.36 50.78,-373.14 50.78,-249.22 U1.7 ; v1(304,641) 308,637 v1(308,519)
MISO1: J13.1 R10.1 U2.3 U5.3 | length 3902.5
  Top Layer w10: v1(-1179,464) -1148.37,464 R10.1 ; v1(-1157.14,67.78) -1156.78,67.78 -893.06,-195.94 -727.45,-195.94 v1(-687.68,-235.71) -677.97,-235.71 -677.97,-260.97 -673,-265.95 -673,-498.13 -820,-645.13 J13.1 ; v1(-540,-133) -614,-59 v1(-614,-28) -612.5,-26.5 -505.74,-26.5 U5.3 ; v1(-189.62,-17.32) -225,-52.7 -225,-180 -198.63,-206.37 -174.24,-206.37 -173.61,-207 204.14,-207 210,-201.14 210,-110.18 189,-89.18 189,-66.82 230.82,-25 U2.3
  Bottom Layer w10: v1(-1179,464) -1179,89.76 -1157.14,67.9 v1(-1157.14,67.78) ; v1(-687.68,-235.71) -605,-153.02 -605,-42.95 -614,-33.95 v1(-614,-28) ; v1(-540,-133) -382,-291 -112.82,-291 -64,-242.18 -64,-221.52 -90.52,-195 -162.98,-195 -207,-150.98 -207,-63.82 -191.5,-48.32 -191.5,-19.21 v1(-189.62,-17.32)
MOSI1: J15.1 U2.4 U5.4 | length 2575.3
  Top Layer w10: v1(-573,-219) -504.24,-150.24 U5.4 ; v1(216,-78) 217.5,-76.5 282.26,-76.5 U2.4 ; v1(313,-662) 594.5,-662 J15.1
  Bottom Layer w10: v1(-573,-219) -566.63,-219 -208,-577.63 -208,-749.55 -151.55,-806 168.95,-806 312.95,-662 v1(313,-662) 313,-630.63 226,-543.63 226,-93.95 216,-83.95 v1(216,-78)
NetC8_1: C8.1 C9.2 U2.8 | length 207.1
  Top Layer w10: U2.8 506.42,-77.18 624.81,-77.18 C9.2 681.84,-79.37 700.03,-97.56 C8.1
NetC10_1: C10.1 C11.2 U2.10 | length 225.7
  Top Layer w10: U2.10 553.66,25 598.34,69.69 C11.2 677.16,69.69 700.03,92.56 C10.1
NetC21_1: C21.1 C22.2 U5.8 | length 223.4
  Top Layer w10: C21.1 -287.31,-286.87 C22.2 -287.31,-78.55 U5.8
NetC23_1: C23.1 C24.2 U5.10 | length 191.8
  Top Layer w10: U5.10 -205.72,25 -177,53.72 C24.2 -177,120.44 C23.1
NetC29_2: C29.2 R9.1 U6.3 | length 194.6
  Top Layer w10: U6.3 -707.72,535 -700,527.28 C29.2 -700,523.35 -695.16,518.5 -691.22,518.5 -687.72,515 R9.1
NetC30_2: C30.2 C31.2 U6.4 | length 477.3
  Top Layer w10: v1(-875,515) -875,527.41 -848.63,553.78 -819.29,553.78 U6.4 ; v1(-800,735) -794.05,735 -784.05,725 C30.2 C31.2
  Bottom Layer w10: v1(-875,515) -875,710 -850,735 v1(-800,735)
NetR4_2: R4.2 U3.3 | length 237.2
  Top Layer w10: R4.2 -565,588.66 -560.16,583.82 -558.19,583.82 -539.37,565 -405,565 -395,555 U3.3
NetR5_2: R5.2 R6.1 U3.5 | length 441.4
  Top Layer w10: R5.2 -669.84,820.16 -630.16,820.16 v1(-630,820) R6.1 ; v1(-375,790) -370.79,785.79 -370.79,770.79 -370,770 -370,758.03 -345,733.03 U3.5
  Bottom Layer w10: v1(-630,820) -615,835 -420,835 v1(-375,790)
NetR8_2: R8.2 R11.2 U6.7 | length 184.6
  Top Layer w10: R8.2 -1105.47,639.84 -1105.47,580.16 R11.2 -1068.7,580 -1043.39,554.68 U6.7
NetR10_2: R10.2 U6.9 | length 136.3
  Top Layer w10: R10.2 -1100.16,464.84 -1084.65,464.84 -1034.17,515.32 U6.9
NetR12_2: R12.2 U6.8 | length 119.9
  Top Layer w10: R12.2 -1063.39,520 -1048.39,535 U6.8
SCK1: J14.1 R12.1 U2.2 U5.2 | length 3680
  Top Layer w10: v1(-1162.01,497.99) -1157.8,502.2 -1157.8,508.86 -1146.65,520 R12.1 ; v1(-1137,100) -1131.05,100 -1112.59,81.54 -1104.54,81.54 -957.09,-65.91 -819.3,-65.91 -653.85,-231.36 v1@-653.85,-256.15 ; v1@-646.38,-254.38 -605.99,-294.77 -590.44,-294.77 -551,-334.21 -551,-754 J14.1 ; v1(-581,22) -579.5,23.5 -505.74,23.5 U5.2 ; v1(-180,-75) -209,-104 -209,-170 -188.63,-190.37 -167.61,-190.37 -166.98,-191 179,-191 191,-179 191,-115.85 174.14,-98.99 174.14,-96.95 173,-95.81 173,-47.86 242.33,21.48 280.24,21.48 U2.2
  Bottom Layer w10: v1(-1162.01,497.99) -1162.01,496.16 -1141,475.15 -1141,376.72 -1140,375.72 -1140,136 -1131.21,127.21 -1132.79,125.63 -1132.79,104.21 v1(-1137,100) ; v1(-649.64,-251.13) -649.64,-250.64 -581,-182 ; v1(-581,22) -581,-182 ; v1(-180,-75) -175.79,-79.21 -155.16,-79.21 -48,-186.37 -48,-248.81 -106.19,-307 -388.63,-307 -404.63,-291 -472,-291 -546,-217 -546,-207.82 -561.82,-192 -571,-192 -581,-182
UART2_RX_3V3: J7.1 J18.6 | length 1783.9
  Bottom Layer w10: J18.6 -81.62,865.38 -81.62,852.93 -84.09,850.46 -84.09,426.11 141,201.02 141,-101.02 5,-237.02 J7.1
UART2_TX_3V3: J8.1 J18.7 | length 1742.2
  Bottom Layer w10: J8.1 -132.5,-490.48 -27,-384.98 -27,-201.37 -32,-196.37 -32,-179.75 -141,-70.75 -141,50 -141,166.98 -138.07,169.91 -109,198.98 -109,850.46 -126,867.46 J18.7
pads on no net: J1. J2. J3. J4. J5. J6. J7. J8. J9. J10. J11. J12. J13. J14. J15. J16. J17. J18.MH1 J18.MH2 U1.3 U1.11 U1.14 U1.18 U1.19 U1.20 U2.7 U2.12 U2.13 U2.14 U4.1 U4.3 U4.5 U4.7 U4.8 U5.7 U5.12 U5.13 U5.14

## Polygon pours and split planes (outlines as drawn)
GND on Bottom Layer "GND_L02_P001" (solid, remove dead copper, pour order 1): -1250,-1250 1250,-1250 1250,1250 -1250,1250
GND on Top Layer "GND_L01_P000" (solid, remove dead copper, pour order 0): -1250,-1250 1250,-1250 1250,1250 -1250,1250

## Keep-outs
Top Layer:
  circle w10: c1125,1125 r125
  circle w10: c0,-1125 r125
  circle w10: c1125,-1125 r125
  circle w10: c-1125,-1125 r125
  circle w10: c0,0 r125
  circle w10: c-1125,1125 r125
Bottom Layer:
  circle w10: c1125,1125 r125
  circle w10: c0,-1125 r125
  circle w10: c1125,-1125 r125
  circle w10: c-1125,-1125 r125
  circle w10: c0,0 r125
  circle w10: c-1125,1125 r125

## Silkscreen, mask and mechanical layers (free items; w line width, h text height)
Top Overlay:
  text "SAST GEN 2.0 BETA" at 562,1067 h30
  text "4096" at -689,1056 h25
  text "Gyro 20k - Accel" at 532,1002 h30
  text "DSP 2024" at 562,932 h30
  text "Pentageer" at 562,857 h30
  text "2048" at -204,766 h25
  text "CONV" at -1099,751 h25
  text "GYRO" at -734,266 h25
  text "GYRO" at -599,251 h25
  text "BUF" at -709,226 h25
  text "RAW" at -579,206 h25
  text "CS" at 802,-643 h30
  text "GYRO" at -1154,-649 h25
  text "CS" at -984,-649 h25
  text "CS" at -709,-654 h25
  text "REF" at -439,-659 h25
  text "REF" at -294,-659 h25
  text "GND" at 1071,-689 h25
  text "3V3" at 936,-694 h25
  text "RX2" at -29,-699 h25
  text "MOSI" at 646,-699 h25
  text "LG1" at 796,-699 h25
  text "CONV" at -1154,-704 h25
  text "LG2" at -999,-704 h25
  text "MISO" at -879,-704 h25
  text "GYRO" at -729,-704 h25
  text "SCK" at -579,-704 h25
  text "2048" at -454,-704 h25
  text "4096" at -319,-704 h25
  text "TX2" at -169,-704 h25
  text "CANH" at 101,-704 h25
  text "CANL" at 236,-704 h25
  text "CPWR" at 371,-704 h25
  text "5VSW" at 501,-704 h25
Board:
  lines w6: -1250,-1250 -1250,1250 1250,1250 1250,-1250 735,-1250 -1250,-1250